# Altium PCB uz_frontpanel_firstfloor.PcbDoc
Units mm, origin at the board's own origin, x right, y up, seen from the top; angles counter-clockwise.
Board outline 129.25 x 56 mm, 4 copper layers (Top Copper, Signal Layer 1, Signal Layer 2, Bottom Copper), stack 1.57 mm thick; 71 components, 51 nets, 205 pads, 56 vias.
Unrouted connection lines stored in the file: 3.
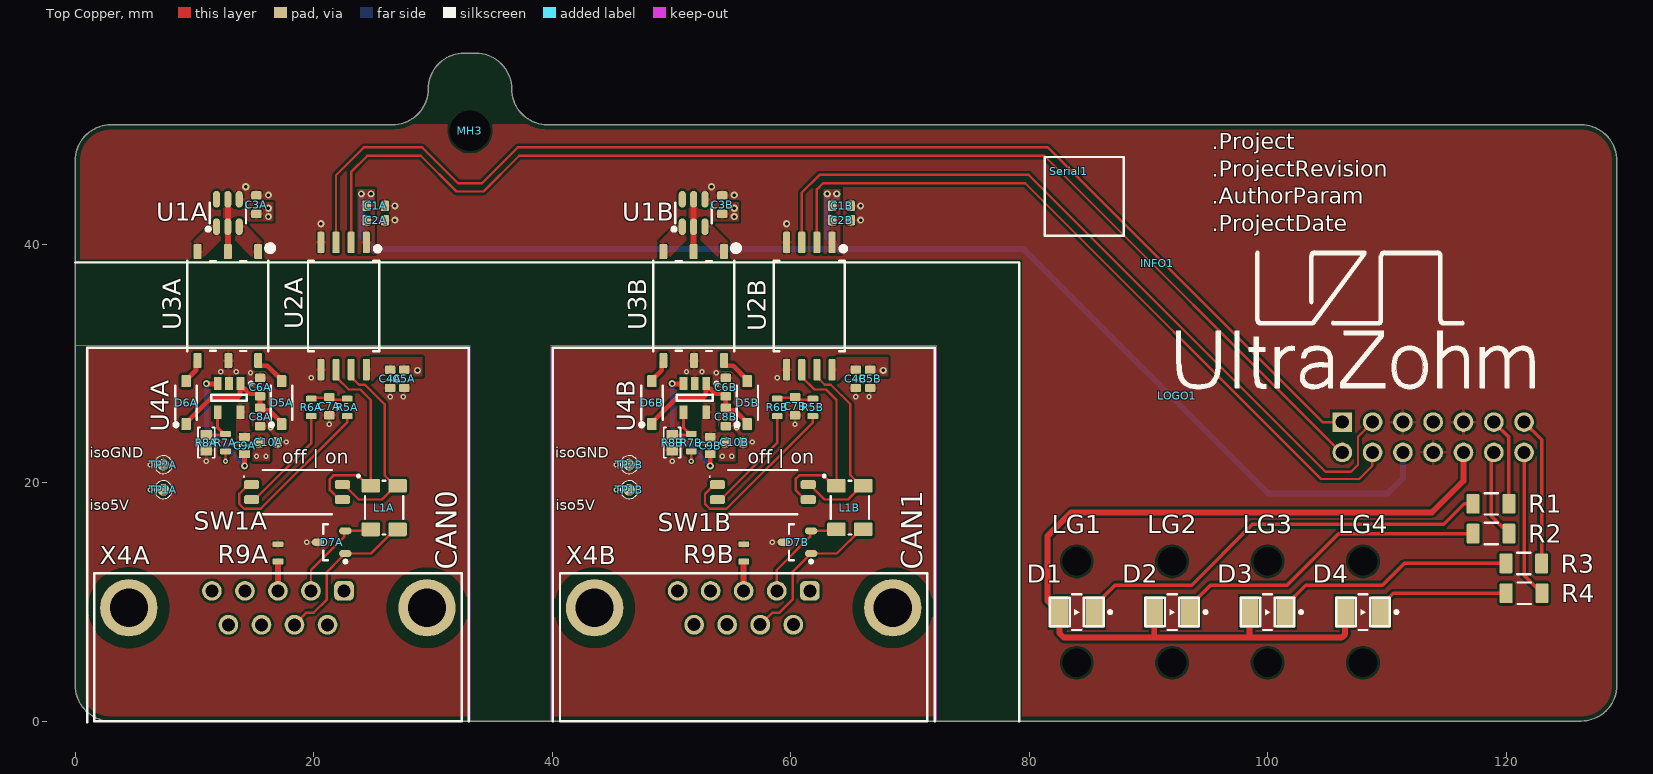
[diagram p0: Top Copper view]
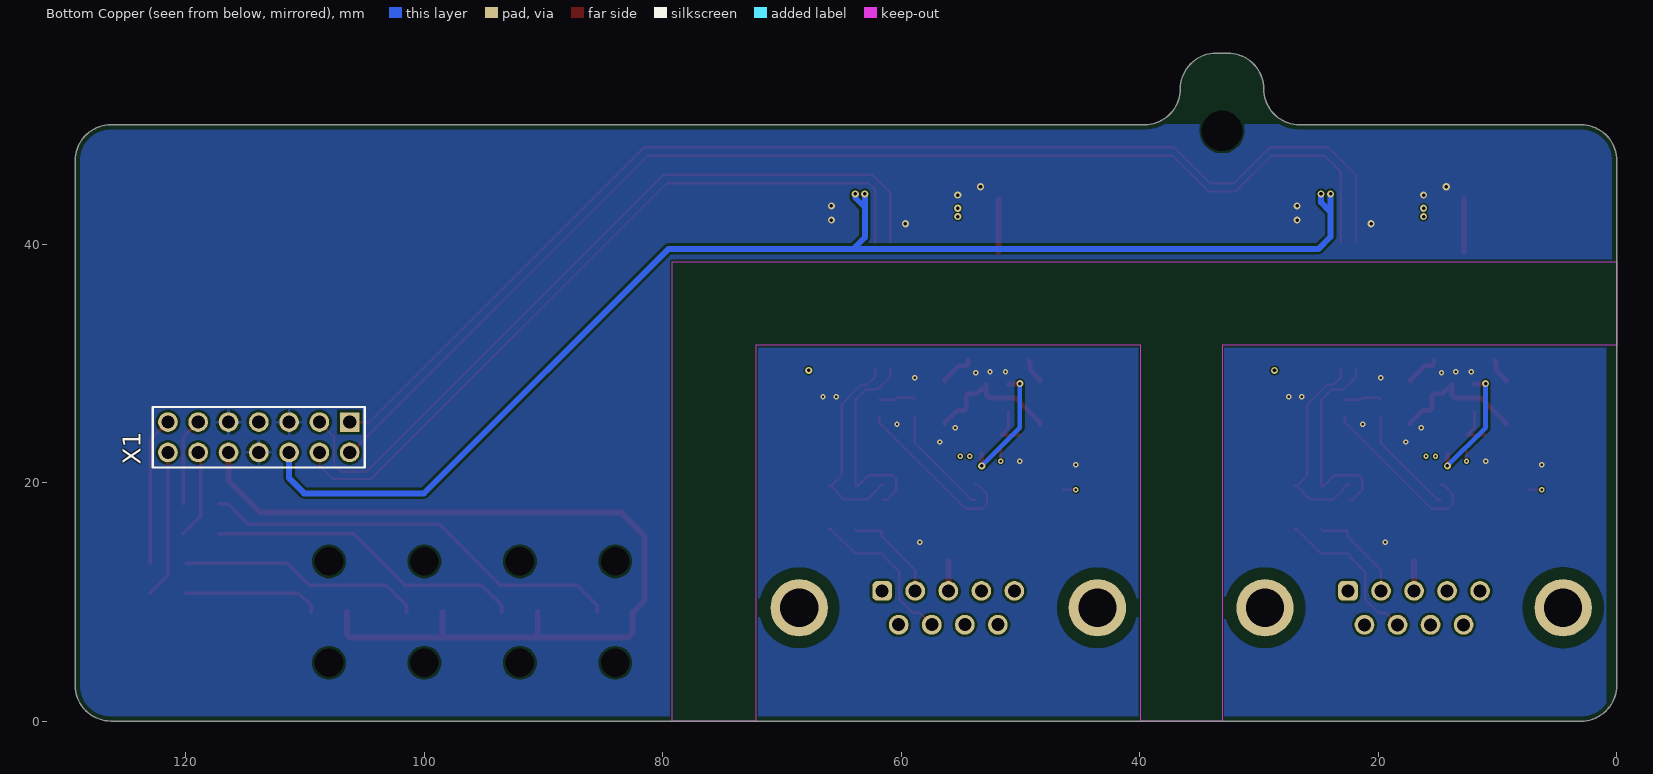
[diagram p1: Bottom Copper view, seen from below]
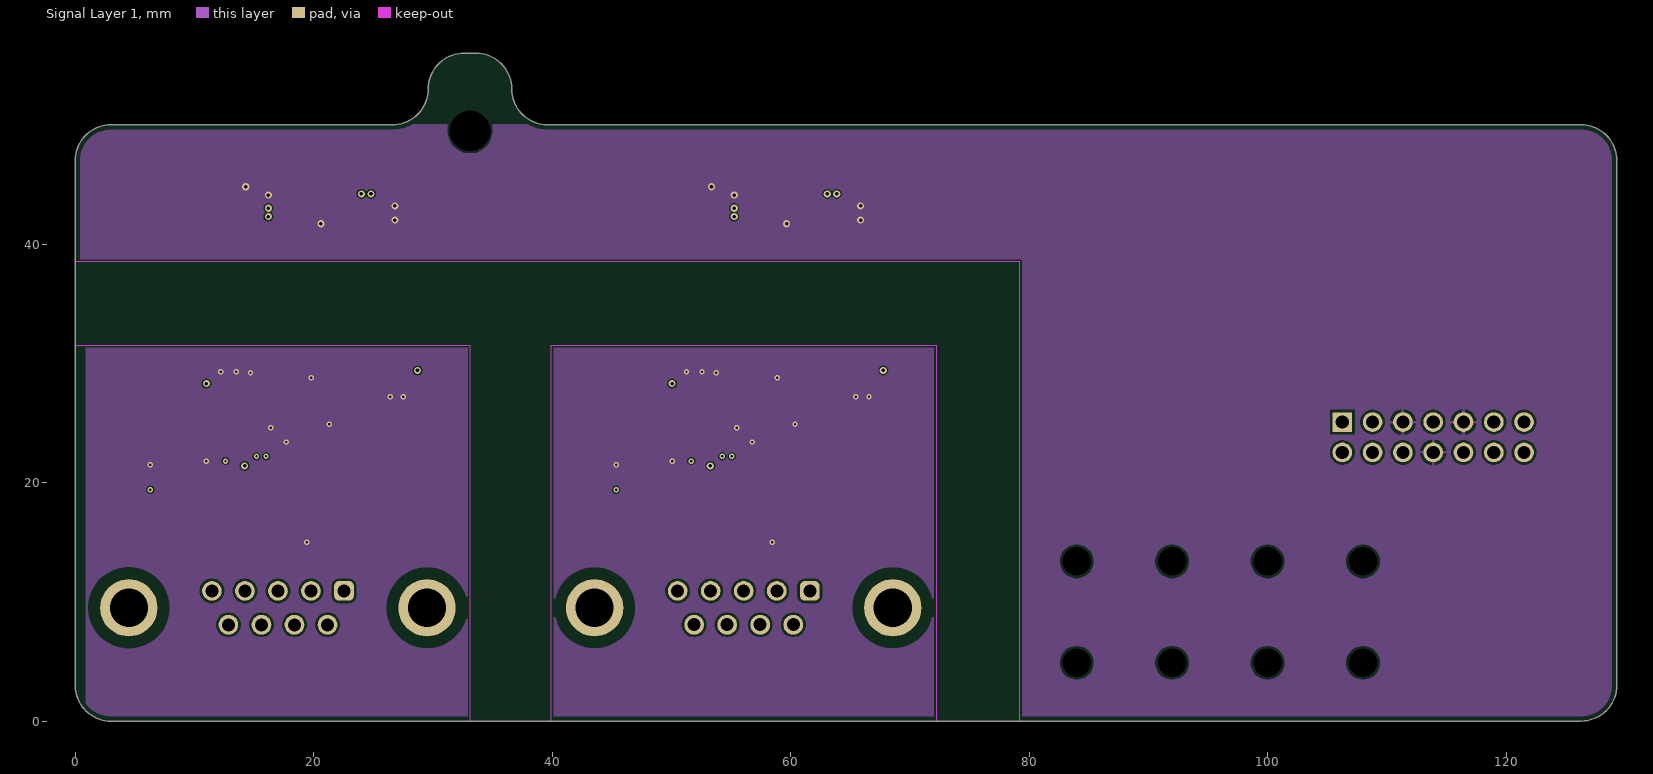
[diagram p2: Signal Layer 1]
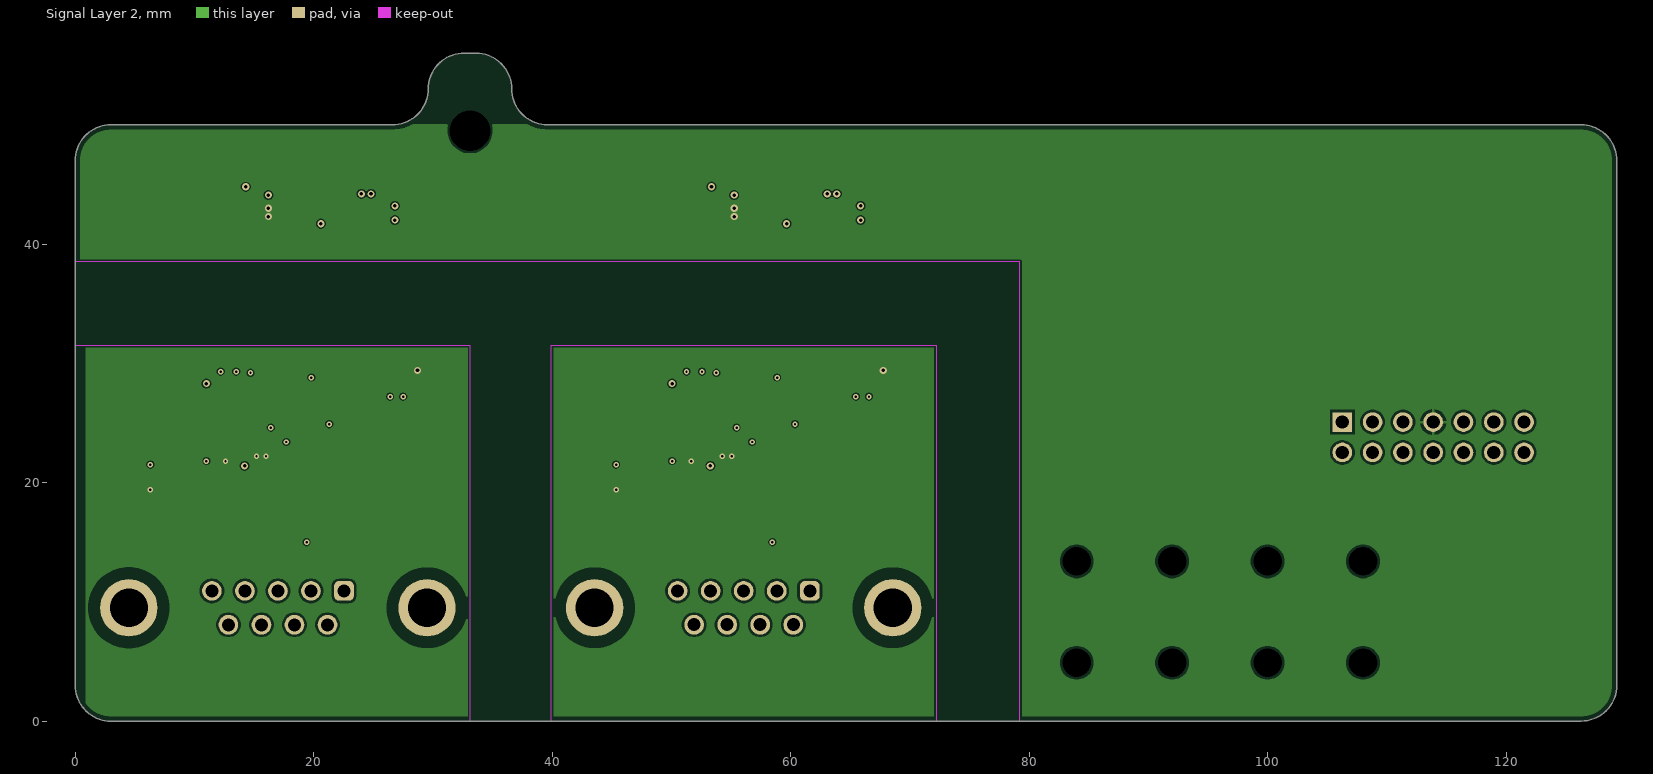
[diagram p3: Signal Layer 2]
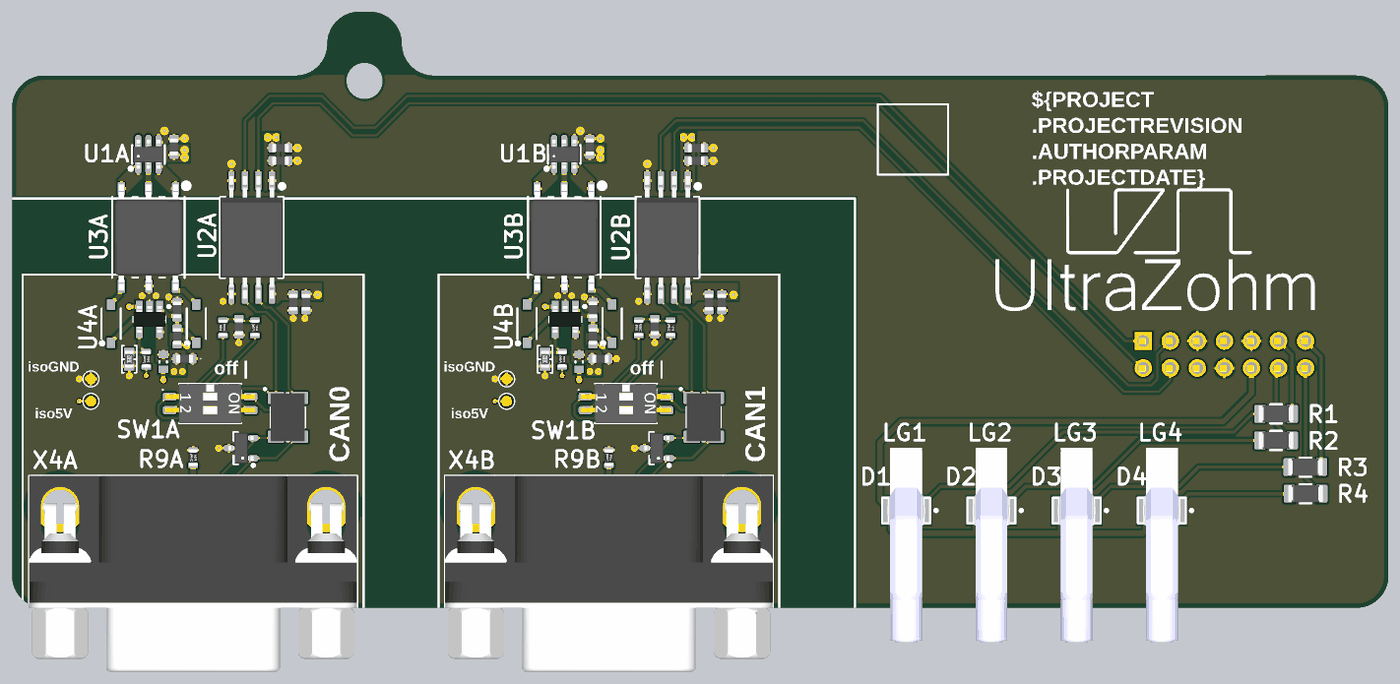
[diagram p4: 3D render of the assembled board from above, using the file's embedded part models]

## Layer stack, top to bottom
Top Mask: solder mask 0.015, Solder Resist, Dk 3.8
Top Copper: signal copper 0.035
Dielectric 1: prepreg 0.2, 7628, Dk 4.6
Signal Layer 1: signal copper 0.0175
Core: core 1.065, FR-4, Dk 4.5
Signal Layer 2: signal copper 0.0175
Dielectric 2: prepreg 0.2, 7628, Dk 4.6
Bottom Copper: signal copper 0.035
Bottom Mask: solder mask 0.015, Solder Resist, Dk 3.8

## Board outline
0,3 0,47 cw(c3,47) 3,50 26.6,50.002 26.6,50 ccw(c26.6,53) 29.6,53 cw(c32.6,53) 32.6,56 33.6,56 cw(c33.6,53) 36.6,53 ccw(c39.6,53) 39.6,50 126.25,50.007 126.25,50 cw(c126.25,47) 129.25,47 129.25,3 cw(c126.25,3) 126.25,0 3,0 cw(c3,3)

## Design rules (kind name [scope] priority, off if disabled: settings)
BoardOutlineClearance BoardOutlineClearance_Silkscreen [OnLayer('Top Overlay')           OR  OnLayer('Bottom Overlay')] p1: gap=0 ignorepadtopadclearanceinfootprint=FALSE
BoardOutlineClearance [All] p2: gap=0.4 ignorepadtopadclearanceinfootprint=FALSE except(0: Arc-SplitContinuation Track-SplitContinuation SMDPad-SplitContinuation THPad-SplitContinuation Via-SplitContinuation Fill-SplitContinuation Poly-SplitContinuation Region-SplitContinuation Text-SplitContinuation)
Clearance Clearance_FGND [InNet('FGND')] p1: gap=0.2 ignorepadtopadclearanceinfootprint=FALSE except(0: Arc-Text Track-Text SMDPad-Text THPad-Text Via-Text Fill-Text Poly-Text Region-Text Text-Text Text-Hole; 0.1: Arc-Arc Arc-Track Track-Track; 0.127: SMDPad-SMDPad; 0.254: Arc-Via Track-Via SMDPad-THPad THPad-THPad Via-Via; 1: Arc-Poly Track-Poly SMDPad-Poly THPad-Poly Via-Poly Fill-Poly Poly-Poly)
Clearance Clearance_HS_PADS [All vs IsThruPin and InNetClass('HS')] p2: gap=0.1 ignorepadtopadclearanceinfootprint=FALSE except(0: Arc-Hole Track-Hole SMDPad-Hole THPad-Hole Via-Hole Fill-Hole Poly-Hole Region-Hole Text-Hole; 0.2: Poly-Poly; 0.3: Via-Poly; 0.5: Track-Poly; 0.516: THPad-Poly)
Clearance Clearance_HS_VIA [InNetClass('HS')] p3: gap=0.1 ignorepadtopadclearanceinfootprint=FALSE except(0: Arc-Hole Track-Hole SMDPad-Hole THPad-Hole Fill-Hole Poly-Hole Region-Hole Text-Hole; 0.2: THPad-Poly Poly-Poly; 0.205: Via-Hole; 0.4: Via-Poly; 0.6: Arc-Poly Track-Poly)
Clearance Clearance_FGND_AETH [InNet('FGND-AETH')] p4: gap=0.2 ignorepadtopadclearanceinfootprint=FALSE except(0: Arc-Text Track-Text SMDPad-Text THPad-Text Via-Text Fill-Text Poly-Text Region-Text Text-Text Text-Hole; 0.1: Arc-Arc Arc-Track Track-Track Via-Poly; 0.127: SMDPad-SMDPad; 0.15: THPad-Region; 0.254: Arc-Via Track-Via SMDPad-THPad THPad-THPad Via-Via)
Clearance Clearance_Power [OnLayer('L02_GND') or OnLayer('L03_VCC')] p5: gap=0.1 ignorepadtopadclearanceinfootprint=FALSE except(0: Arc-Hole Track-Hole SMDPad-Hole THPad-Hole Via-Hole Fill-Hole Poly-Hole Region-Hole Text-Hole; 0.15: Via-Poly; 0.25: THPad-Poly; 0.3: Fill-Poly Poly-Poly; 0.5: Track-Poly)
Clearance Clearance_D100_VIA [InNetClass('D100')] p6: gap=0.1 ignorepadtopadclearanceinfootprint=FALSE except(0: Arc-Hole Track-Hole SMDPad-Hole THPad-Hole Fill-Hole Poly-Hole Region-Hole Text-Hole; 0.2: Track-Poly SMDPad-Poly THPad-Poly Fill-Poly Poly-Poly Poly-Region; 0.204: Via-Hole)
Clearance [All] p7: gap=0.2 ignorepadtopadclearanceinfootprint=FALSE except(0: Arc-Text Track-Text SMDPad-Text THPad-Text Via-Text Fill-Text Poly-Text Region-Text Text-Text Text-Hole; 0.1: Arc-Arc Arc-Track Track-Track Via-Poly; 0.127: SMDPad-SMDPad; 0.254: Arc-Via Track-Via SMDPad-THPad THPad-THPad Via-Via)
ComponentClearance ComponentClearance_SSD [HasFootprint('2199230-3') OR HasFootprint('M.2-NGFF-Socket-2242BM')] p1: gap=-0.1 collisioncheckmode=3 verticalgap=-0.1 showdistances=FALSE
ComponentClearance ComponentClearance_Trenz_TOP [InComponentClass('Top Side Components') and not HasFootprint('TP_1mm') vs InComponentClass('Top Side Components') and not HasFootprint('TP_1mm')] p2: gap=0.3 collisioncheckmode=3 verticalgap=-0.1 showdistances=FALSE
ComponentClearance ComponentClearance_Trenz_BOTTOM [InComponentClass('Bottom Side Components') and not HasFootprint('TP_1mm') vs InComponentClass('Bottom Side Components') and not HasFootprint('TP_1mm')] p3: gap=0.3 collisioncheckmode=3 verticalgap=0 showdistances=FALSE
ComponentClearance ComponentClearance_Trenz [All] p4 off: gap=0.3 collisioncheckmode=3 verticalgap=-0.1 showdistances=FALSE
ComponentClearance [All] p5 off: gap=0.1 collisioncheckmode=3 verticalgap=0.1 showdistances=FALSE
DiffPairsRouting DiffPairsRouting_d100 [InNetClass('D100')] p1: maxlimit=0.12 minlimit=0.12 mostfreqgap=0.12 toplayer_minwidth=0.15 toplayer_maxwidth=0.15 toplayer_prefwidth=0.15 midlayer1_minwidth=0.1 midlayer1_maxwidth=0.1 midlayer1_prefwidth=0.1 midlayer2_minwidth=0.1 midlayer2_maxwidth=0.1 midlayer2_prefwidth=0.1 bottomlayer_minwidth=0.15 bottomlayer_maxwidth=0.15 bottomlayer_prefwidth=0.15 impedanceprofiledriven=TRUE impedanceprofileid={A87F44F6-0E67-4024-941D-6C37FD41847A} maxuncoupledlength=12.7
DiffPairsRouting [All] p2: maxlimit=0.254 minlimit=0.2 mostfreqgap=0.2 toplayer_minwidth=0.09 toplayer_maxwidth=0.254 toplayer_prefwidth=0.2 midlayer1_minwidth=0.09 midlayer1_maxwidth=0.254 midlayer1_prefwidth=0.2 midlayer2_minwidth=0.1 midlayer2_maxwidth=0.254 midlayer2_prefwidth=0.2 bottomlayer_minwidth=0.09 bottomlayer_maxwidth=0.254 bottomlayer_prefwidth=0.2 maxuncoupledlength=70
Height [All] p1: minheight=0 maxheight=50 prefheight=12.7
HoleSize [All] p1: absolutevalues=TRUE maxlimit=6.3 minlimit=0.15 maxpercent=80.000 minpercent=20.000
MatchedLengths [InNetClass('SATA') or InNetClass('HS')] p1: tolerance=0.1 checknetsindiffpair=TRUE checkdiffpairvsdiffpair=FALSE checkxsignals=FALSE checkothers=FALSE
MinimumSolderMaskSliver [All] p1: minsoldermaskwidth=0.1
PolygonConnect "PWR Mosfets" [(InNetClass('PWR') AND HasFootprint('SOIC127P600X175-8N'))] p1: connectstyle=Relief reliefconductorwidth=0.254 reliefentries=4 polygonreliefangle="90 Angle" airgapwidth=0.125
PolygonConnect PWR [InNetClass('PWR')] p2: connectstyle=Direct reliefconductorwidth=0.2 reliefentries=4 polygonreliefangle="90 Angle" airgapwidth=0.25
PolygonConnect PolygonConnect_Therm [HoleSize > 2.6] p3: connectstyle=Direct reliefconductorwidth=0.254 reliefentries=4 polygonreliefangle="90 Angle" airgapwidth=0.254
PolygonConnect PolygonConnect_via [InPadClass('pad') or IsVia] p4: connectstyle=Direct reliefconductorwidth=0.254 reliefentries=4 polygonreliefangle="90 Angle" airgapwidth=0.254
PolygonConnect PolygonConnect_GND [InNet('GND')] p5: thpad.connectstyle=Relief thpad.reliefconductorwidth=0.254 thpad.reliefentries=4 thpad.polygonreliefangle="90 Angle" thpad.airgapwidth=0.254 smdpad.connectstyle=Relief smdpad.reliefconductorwidth=0.254 smdpad.reliefentries=4 smdpad.polygonreliefangle="90 Angle" smdpad.airgapwidth=0.102 via.connectstyle=Direct via.reliefconductorwidth=0.254 via.reliefentries=4 via.polygonreliefangle="90 Angle" via.airgapwidth=0.254
PolygonConnect PolygonConnect_default [All] p6: thpad.connectstyle=Relief thpad.reliefconductorwidth=0.254 thpad.reliefentries=4 thpad.polygonreliefangle="90 Angle" thpad.airgapwidth=0.254 smdpad.connectstyle=Relief smdpad.reliefconductorwidth=0.254 smdpad.reliefentries=4 smdpad.polygonreliefangle="90 Angle" smdpad.airgapwidth=0.102 via.connectstyle=Direct via.reliefconductorwidth=0.254 via.reliefentries=4 via.polygonreliefangle="90 Angle" via.airgapwidth=0.254
ReturnPath ReturnPath_Diff [InNetClass('ADC_OUT_P[1..10]') OR InNetClass('ADC_OUT_N[1..10]') or InNetClass('CLK_Ext_P[1..2]') or InNetClass('CLK_Ext_N[1..2]') or InNetClass('CLK_P[1..10]') OR InNetClass('CLK_N[1..10]') or InNetClass('ExtADC_DataOut_P[1..5]') or InNetClass('ExtADC_DataOut_N[1..5]')] p1 off: impedanceprofileid={A4AA20AD-5FED-4174-92F6-DFDFDA660EC9} _gaplimit=0 _useantipads=TRUE
RoomDefinition isoCAN0 [InComponentClass('isoCAN0')] p1: confinementstyle=ConfineIn formatcopy=TRUE lockcomponents=FALSE outline 32.821,44.853 1.221,44.853 1.221,-6.247 32.821,-6.247
RoomDefinition isoCAN1 [InComponentClass('isoCAN1')] p2: confinementstyle=ConfineIn formatcopy=TRUE lockcomponents=FALSE outline 71.871,44.853 40.271,44.853 40.271,-6.247 71.871,-6.247
RoutingVias [All] p1: holewidth=0.2 width=0.4 viastyle="Through Hole" minholewidth=0.2 minwidth=0.4 maxholewidth=0.5 maxwidth=1
SolderMaskExpansion [All] p1 off: expansion=0.102 istentingtop=FALSE
SolderMaskExpansion SolderMaskExpansion_Trenz [All] p2: expansion=0 istentingtop=FALSE
UnRoutedNet [All] p1: checkbadconnections=TRUE
ViasUnderSMD [All] p1: allowed=FALSE
Width [All] p1: maxlimit=10 minlimit=0.09 preferedwidth=0.15 midlayer1_prefwidth=0.1 midlayer2_prefwidth=0.1 minimp=50.000000 maximp=50.000000 favimp=50.000000
24 further rules are at their usual default settings.

## Classes and differential pairs
channel class isoCAN: isoCAN0 isoCAN1
component class isoCAN1: C1B C2B C3B C4B C5B C6B C7B C8B C9B C10B D5B D6B D7B L1B R5B R6B R7B R8B R9B SW1B TP1B TP2B U1B U2B U3B U4B X4B
component class isoCAN0: C1A C2A C3A C4A C5A C6A C7A C8A C9A C10A D5A D6A D7A L1A R5A R6A R7A R8A R9A SW1A TP1A TP2A U1A U2A U3A U4A X4A

## Components (designator, comment, footprint, x,y, rotation, side; value= is the part's Value field where it differs from the comment)
C1A "10 µF" C_0603_TE 25.2,43.2 r270 top (schematic designator C1)
C1B "10 µF" C_0603_TE 64.25,43.2 r270 top (schematic designator C1)
C2A "100 nF" C_0603_TE 25.2,42 r270 top (schematic designator C2)
C2B "100 nF" C_0603_TE 64.25,42 r270 top (schematic designator C2)
C3A "100 nF" C_0603_TE 15.2,43.3 r0 top (schematic designator C3)
C3B "100 nF" C_0603_TE 54.25,43.3 r0 top (schematic designator C3)
C4A "100 nF" C_0603_TE 26.4,28.7 r180 top (schematic designator C4)
C4B "100 nF" C_0603_TE 65.45,28.7 r180 top (schematic designator C4)
C5A "10 µF" C_0603_TE 27.6,28.7 r180 top (schematic designator C5)
C5B "10 µF" C_0603_TE 66.65,28.7 r180 top (schematic designator C5)
C6A "10 µF" C_0603_TE 15.5,28 r0 top (schematic designator C6)
C6B "10 µF" C_0603_TE 54.55,28 r0 top (schematic designator C6)
C7A "4.7 nF" C_0603_TE 21.3,26.4 r0 top (schematic designator C7)
C7B "4.7 nF" C_0603_TE 60.35,26.4 r0 top (schematic designator C7)
C8A "10 µF" C_0603_TE 15.5,25.5 r180 top (schematic designator C8)
C8B "10 µF" C_0603_TE 54.55,25.5 r180 top (schematic designator C8)
C9A "1 nF" C_0603 14.2,23.1 r90 top (schematic designator C9)
C9B "1 nF" C_0603 53.25,23.1 r90 top (schematic designator C9)
C10A "10 µF" C_0603_TE 16.2,23.4 r270 top (schematic designator C10)
C10B "10 µF" C_0603_TE 55.25,23.4 r270 top (schematic designator C10)
D1 "LG T67K-H2K1-24-Z" FP-LS_T676-Q1R2-1-Z-MFG 83.97,9.14 r180 top
D2 "LG T67K-H2K1-24-Z" FP-LS_T676-Q1R2-1-Z-MFG 91.97,9.14 r180 top
D3 "LS T676-Q1R2-1" FP-LS_T676-Q1R2-1-Z-MFG 99.97,9.14 r180 top
D4 "LG T67K-H2K1-24-Z" FP-LS_T676-Q1R2-1-Z-MFG 107.97,9.14 r180 top
D5A "MBR0520LT1G" SOD3816X120N 17.3,26.7 r90 top value=- (schematic designator D5)
D5B "MBR0520LT1G" SOD3816X120N 56.35,26.7 r90 top value=- (schematic designator D5)
D6A "MBR0520LT1G" SOD3816X120N 9.3,26.7 r90 top value=- (schematic designator D6)
D6B "MBR0520LT1G" SOD3816X120N 48.35,26.7 r90 top value=- (schematic designator D6)
D7A "CDSOT23-T24CAN" SOT95P237X112-3N 21.5,15 r180 top value="TVS, 24 V" (schematic designator D7)
D7B "CDSOT23-T24CAN" SOT95P237X112-3N 60.55,15 r180 top value="TVS, 24 V" (schematic designator D7)
INFO1 "Design Information" Design_info 90.7,38.4 r0 top
L1A "744235900" WE-CNSW-1812 25.9,17.9 r270 top value="50 mOhm" (schematic designator L1)
L1B "744235900" WE-CNSW-1812 64.95,17.9 r270 top value="50 mOhm" (schematic designator L1)
LG1 "1271.1000" 1271.1000 83.97,13.39 r270 top locked
LG2 "1271.1000" 1271.1000 91.97,13.39 r270 top locked
LG3 "1271.1000" 1271.1000 99.97,13.39 r270 top locked
LG4 "1271.1000" 1271.1000 107.97,13.39 r270 top locked
LOGO1 "UZ Logo" UZ_Logo_small 92.4,27.3 r0 top
MH3 "Mounting Hole" MH_3.4 33.1,49.5 r90 top
R1 "1k6" R_1206_TE 118.705,18.22 r90 top
R2 "1k6" R_1206_TE 118.705,15.72 r90 top
R3 "4k7" R_1206_TE 121.45,13.22 r90 top
R4 "1k6" R_1206_TE 121.475,10.72 r90 top
R5A "62R" R_0603_TE 22.8,26.3 r0 top (schematic designator R5)
R5B "62R" R_0603_TE 61.85,26.3 r0 top (schematic designator R5)
R6A "62R" R_0603_TE 19.8,26.3 r180 top (schematic designator R6)
R6B "62R" R_0603_TE 58.85,26.3 r180 top (schematic designator R6)
R7A "22k" R_0603_TE 12.6,23.35 r0 top (schematic designator R7)
R7B "22k" R_0603_TE 51.65,23.35 r0 top (schematic designator R7)
R8A "6k98" "RES 0603_1608" 11,23.35 r90 top (schematic designator R8)
R8B "6k98" "RES 0603_1608" 50.05,23.35 r90 top (schematic designator R8)
R9A "0R" R_0603_TE 17,14.1 r0 top (schematic designator R9)
R9B "0R" R_0603_TE 56.05,14.1 r0 top (schematic designator R9)
Serial1 "Serial #" SERIAL 83.3,46.1 r0 top
SW1A "218-2LPSTR" 2182LPSTR 18.6,19.2 r270 top (schematic designator SW1)
SW1B "218-2LPSTR" 2182LPSTR 57.65,19.2 r270 top (schematic designator SW1)
TP1A "Testpoint 1mm" TP_1mm 7.4,19.4 r90 top (schematic designator TP1)
TP1B "Testpoint 1mm" TP_1mm 46.45,19.4 r90 top (schematic designator TP1)
TP2A "Testpoint 1mm" TP_1mm 7.4,21.5 r90 top (schematic designator TP2)
TP2B "Testpoint 1mm" TP_1mm 46.45,21.5 r90 top (schematic designator TP2)
U1A "SN6505" SOT95P280X145-6N 12.8,42.6 r90 top (schematic designator U1)
U1B "SN6505" SOT95P280X145-6N 51.85,42.6 r90 top (schematic designator U1)
U2A "ISO1042" SOIC127P1150X280-8L50N 22.5,34.8 r270 top (schematic designator U2)
U2B "ISO1042" SOIC127P1150X280-8L50N 61.55,34.8 r270 top (schematic designator U2)
U3A "760390015" 760390015 12.8,34.8 r270 top (schematic designator U3)
U3B "760390015" 760390015 51.85,34.8 r270 top (schematic designator U3)
U4A "LT1761" SOT23-5_N 12.9,27.1 r270 top (schematic designator U4)
U4B "LT1761" SOT23-5_N 51.95,27.1 r270 top (schematic designator U4)
X1 "MTSW-107-11-T-D-740" MTSW-107-11-T-D-740 106.235,25.07 r0 bottom locked
X4A "D-SUB 9, female" 618009231121 17,6.2 r0 top locked (schematic designator X4)
X4B "D-SUB 9, female" 618009231121 56.05,6.2 r0 top locked (schematic designator X4)

## Footprints (in the part's own frame and the unit in brackets; to place one, negate y for a bottom-side part, rotate by r counter-clockwise, add the part's x,y. Pads: shape width x height; smd on the part's side, far side on the other; paste and mask are expansions set on the pad)
1271.1000 [mm]
  round 2.1 hole 2.4 unplated: 1(0,0) 2(8.5,0)
  silkscreen extent 3.05,-2.25 5.45,2.25, body extent -1.65,-1.5 16.64,1.5, height 6.58
2182LPSTR [mm]
  rrect50% 0.76x1.27 smd: 1(-0.635,-3.81) 2(0.635,-3.81) 3(0.635,3.81) 4(-0.635,3.81)
  silkscreen extent -1.86,-4.5 1.86,2.9, body extent -1.86,-4.22 1.86,4.22, height 2.5
760390015 [mm]
  rrect30% 1.27x0.66 smd: 1(-4.57,2.54) 2(-4.57,0) 3(-4.57,-2.54) 4(4.57,-2.54) 5(4.57,0.04) 6(4.57,2.54)
  silkscreen extent -5.1,-3.4 3.8,3.8, body extent -4.98,-3.23 4.98,3.25, height 4.06
618009231121 [mm] "9 pins, right angled, 8.08mm, with hex screw"
  rrect50% 1.65x1.65 hole 1.09: 1(5.54,4.72)
  round 1.65 hole 1.09: 2(2.77,4.72) 3(0,4.72) 4(-2.77,4.72) 5(-5.54,4.72) 6(4.155,1.88) 7(1.385,1.88) 8(-1.385,1.88) 9(-4.155,1.88)
  round 4.8 hole 3.2: M1(-12.5,3.3) M2(12.5,3.3)
  silkscreen extent -15.4,-6.2 15.4,6.2, body extent -15.4,-12.2 15.4,6.2, height 12.55
C_0603 [mm] "Chip Capacitor, Body 1.6x0.8mm, Height 1.0mm, IPC High Density"
  rect 0.7x0.9 smd: 1(-0.7,0) 2(0.7,0)
  silkscreen extent -0.05,-0.35 0.05,0.35, body extent -0.87,-0.47 0.88,0.48, height 1
C_0603_TE [mm] "Vishay VJ0603 1.6 x 0.8 (+0.15/-0.1) 0.4 +/- 0,15mm Kontakte"
  rrect33% 0.88x0.71 smd: 1(0,0.77) 2(0,-0.77)
  body extent -0.4,-0.8 0.4,0.8, height 1
Design_info [mm] "Design information about the PCB"
FP-LS_T676-Q1R2-1-Z-MFG [mm]
  rect 1.5x2.6 smd paste+0 mask+0: 1(-1.5,0) 2(1.5,0)
  silkscreen extent -2.93,-1.5 0.38,1.5, body extent -2.35,-1.6 2.35,1.6, height 0.25
MH_3.4 [mm]
  round 3.1 hole 3.4 unplated: 1(0,0)
MTSW-107-11-T-D-740 [mm]
  rect 1.65x1.65 hole 1.1: 1(0,0)
  round 1.65 hole 1.1: 2(0,2.54) 3(2.54,0) 4(2.54,2.54) 5(5.08,0) 6(5.08,2.54) 7(7.62,0) 8(7.62,2.54) 9(10.16,0) 10(10.16,2.54) 11(12.7,0) 12(12.7,2.54) 13(15.24,0) 14(15.24,2.54)
  silkscreen extent -1.27,-1.27 16.51,3.81, body extent -1.38,-1.24 16.4,3.84, height 21.34
R_0603_TE [mm] "Vishay D0603 1.55 x 0.85 (+0.1/-0.05) 0.3 +/- 0,2mm Kontakte"
  rrect33% 0.9x0.5 smd: 1(0,0.73) 2(0,-0.73)
  body extent -0.42,-0.78 0.43,0.77, height 0.45
R_1206_TE [mm] "Vishay D1206 3.2 x 1.6 (+/- 0.15), 0.2mm - 0.6mm Kontakte"
  rrect20% 1.66x1.1 smd: 1(0,1.5) 2(0,-1.5)
  silkscreen extent -0.9,-0.55 0.9,0.55, body extent -0.8,-1.62 0.8,1.63, height 0.6
"RES 0603_1608" [mm] "Chip Resistor, 2-Leads, Body 1.60x0.80mm, IPC Medium Density"
  rect 0.85x0.95 smd: 1(-0.65,0) 2(0.65,0)
  silkscreen extent -1.27,-0.7 1.27,0.7, body extent -0.8,-0.4 0.8,0.4, height 0.45
SERIAL [mm]
  silkscreen extent -2,-5.4 4.6,1.2
SOD3816X120N [mm]
  rrect20% 1x0.8 smd: 1(-1.8,0) 2(1.8,0)
  silkscreen extent -2,-0.9 1.43,1, body extent -1.42,-0.9 1.43,0.9, height 1.2
SOIC127P1150X280-8L50N [mm] "Small Outline IC (SOIC), 1.27 mm pitch; 8 pin, 5.85 mm L X 7.50 mm W X 2.80 mm H body"
  rrect33% 1.8x0.59 smd: 1(-5.33,1.905) 2(-5.33,0.635) 3(-5.33,-0.635) 4(-5.33,-1.905) 5(5.33,-1.905) 6(5.33,-0.635) 7(5.33,0.635) 8(5.33,1.905)
  silkscreen extent -5,-2.98 3.8,3.05, body extent -5.75,-2.93 5.75,2.93, height 2.8
SOT23-5_N [mm] "SOT23, 5-Leads, Body 2.9x1.6mm, Pitch 0.95mm, Lead Span 2.8mm, IPC Medium Density"
  rect 1.1x0.65 smd: 1(-1.2,0.95) 2(-1.2,0) 3(-1.2,-0.95) 4(1.2,-0.95) 5(1.2,0.95)
  silkscreen extent -1.32,-1.5 0.25,1.95, body extent -1.25,-1.5 1.25,1.5, height 1.06
SOT95P237X112-3N [mm]
  oval 1.05x0.6 smd: 1(-1.15,0.95) 2(-1.15,-0.95) 3(1.15,0)
  silkscreen extent -1.28,-1.5 0.7,1.75, body extent -1.18,-1.46 1.19,1.46, height 1.12
SOT95P280X145-6N [mm]
  oval 1.4x0.6 smd: 1(-1.15,0.95) 2(-1.15,0) 3(-1.15,-0.95) 4(1.15,-0.95) 5(1.15,0) 6(1.15,0.95)
  silkscreen extent -1.5,-1.53 0.87,1.8, body extent -1.35,-1.45 1.35,1.45, height 1.45
TP_1mm [mm]
  round 1 smd paste-1: 1(0,0)
  silkscreen extent -0.75,-0.75 0.75,0.75
UZ_Logo_small [mm] "logo width 3cm"
  silkscreen extent -0.05,0.57 29.94,12.12
WE-CNSW-1812 [mm]
  rrect20% 1.15x1.55 smd: 1(-1.825,-1.125) 2(1.825,-1.125) 3(1.825,1.125) 4(-1.825,1.125)
  silkscreen extent -2.75,-2.25 2.25,1.6, body extent -2.25,-1.6 2.25,1.6, height 2.81

## Part data
C1A C1B C5A C5B C6A C6B C8A C8B C10A C10B: library part UZgen_C_0603_10uF_16V_X7R, "Generic capacitor", Device Package=0603, Manufacturer=UZgen, Tolerance="10 %", Voltage=16V, Created from=UZgenTool, Created On="02/08/2024 11:17:59", Last Updated="02/08/2024 11:17:59", Manufacturer Part Number=UZgen_C_0603_10uF_16V_X7R, Mounting Type=SMD, PartID=3807, Technology=X7R
C2A C2B C3A C3B C4A C4B: library part UZgen_C_0603_100nF_50V_X7R, "Generic capacitor", Device Package=0603, Manufacturer=UZgen, Tolerance="10 %", Voltage=50V, Created from=AGeiger, Created On="02/07/2024 14:42:23", Last Updated="08/08/2024 15:01:15", Manufacturer Part Number=UZgen_C_0603_100nF_50V_X7R, Mounting Type=SMD, PartID=1, Technology=X7R
C7A C7B: library part UZgen_C_0603_4.7nF_50V_X7R, "Generic capacitor", Device Package=0603, Manufacturer=UZgen, Tolerance="10 %", Voltage=50V, Created from=UZgenTool, Created On="02/08/2024 11:18:09", Last Updated="02/08/2024 11:18:09", Manufacturer Part Number=UZgen_C_0603_4.7nF_50V_X7R, Mounting Type=SMD, PartID=4255, Technology=X7R
C9A C9B: library part CC0603JRNPO9BN102, "Capacitor 0603, 50 VDC, 1 nF, NP0", Device Package=0603, LCSC Part Number=C106246, Manufacturer=YAGEO, Operating Temperature="-55 - 125°C", Tolerance="5 %", Voltage Rating="50 VDC", Component Type="Capacitor 0603", ComponentLink1Description=Datasheet, ComponentLink1URL=https://datasheet.lcsc.com/lcsc/1811021411_YAGEO-CC0603JRNPO9BN102_C106246.pdf, Created from=AGeiger, Created On="30.08.2022 11:46:28", Last Updated="30.08.2022 11:46:28", Live Cycle Status=1, Manufacturer Part Number=CC0603JRNPO9BN102, Mounting Type=SMD, PartID=104, Series=NP0, Supplier 1=LCSC, Supplier Part Number 1=C106246, Type=Capacitor
D1 D2 D4: "Standard LEDs - SMD Green, 570nm 9mcd, 2mA", Color=green, Device Package=PLCC-2, Forward Current I_f="20 mA", Forward Voltage U_f=2.2V, LCSC Part Number=C5248446, Manufacturer="OSRAM Opto Semicon", Nominal Power=44mW, Operating Temperature="-40 - 100 °C", Component Type="LED Diode", ComponentLink1Description=Datasheet, ComponentLink1URL=https://dammedia.osram.info/media/resource/hires/osram-dam-5522864/LG%20T67K_EN.pdf, Created from=FRosner, Created On="17/07/2024 13:28:00", Last Updated="17/07/2024 14:01:05", Light Intensity="6.28 mcd", Live Cycle Status=1, Manufacturer Part Number="LG T67K-H2K1-24-Z", Mounting Type=SMD, PartID=17, Stock number="not stored", Supplier 1=LCSC, Supplier Part Number 1=C5248446, Type=Standard, Wavelength="570 nm"
D3: "Standard LEDs - SMD Super Red, 645nm 180mcd, 20mA", Color=red, Device Package=PLCC-2, Forward Current I_f="20 mA", Forward Voltage U_f=2.3V, LCSC Part Number=C19360690, Manufacturer="OSRAM Opto Semicon", Nominal Power=46mW, Operating Temperature="-40 - 100 °C", Component Type="LED Diode", ComponentLink1Description=Datasheet, ComponentLink1URL=https://wmsc.lcsc.com/wmsc/upload/file/pdf/v2/lcsc/2312251447_OSRAM-Opto-Semicon-LS-T676-Q1R2-1_C19360690.pdf, Created from=FRosner, Created On="17/07/2024 13:16:06", Last Updated="17/07/2024 13:21:16", Light Intensity="71 ... 180 mcd", Live Cycle Status=1, Manufacturer Part Number="LS T676-Q1R2-1", Mounting Type=SMD, PartID=16, Stock number="not stored", Supplier 1=LCSC, Supplier Part Number 1=C19360690, Type=Standard, Wavelength="633 nm"
D5A D5B D6A D6B: "Schottky Diodes & Rectifiers 0.5A 20V", Case=SOD123-FC, Device Package=SMD, Forward Current="0.5 A", Forward Voltage=20V, LCSC Part Number=C23848, Manufacturer=onsemi, Operating Temperature="-65 to +125 °C", Reverse Current="250 uA", Supplier Part Number 1=863-MBR0520LT1G, Voltage=0.5A, AN=26768, Component Type="Power Schottky Rectifier", ComponentLink1Description=Datasheet, ComponentLink1URL=https://www.mouser.de/datasheet/2/308/1/MBR0520LT1_D-2315148.pdf, Created from=FRosner, Created On="10.06.2024 16:38:30", Extra=AEC−Q101, H-ART=MBR0520LT1G, helpURL=B:\AD\adlib\datasheet\MBR0520, Last Updated="22.08.2024 08:31:16", Live Cycle Status=1, Manufacturer Part Number=MBR0520LT1G, Mixed=SMT, Mounting Type=SMD, PartID=15, Series=MBR0520L, Stock number="not stored", Supplier 1=Mouser, Supplier 2=LCSC, Supplier Part Number 2=C23848, Type="Power Schottky Rectifier"
D7A D7B: "ESD Protection Diodes / TVS Diodes SOT-23 24V CANbus", Device Package=SOT-23-3, LCSC Part Number=C2959841, Manufacturer=Bourns, Operating Temperature="-55 to +150 °C", Power Dissipation="500 W", Supplier Part Number 1=652-CDSOT23-T24CAN, Component Type="TVS Diode, ESD", ComponentLink1Description=Datasheet, ComponentLink1URL=https://www.mouser.de/datasheet/2/54/cdsot23_t24can_q-1534349.pdf, Created from=AGeiger, Created On="22.08.2024 08:08:03", Last Updated="22.08.2024 08:08:03", Live Cycle Status=1, Manufacturer Part Number=CDSOT23-T24CAN, Mounting Type=SMD, PartID=18, Supplier 1=Mouser, Supplier 2=LCSC, Supplier Part Number 2=C2959841, Type=TVS-Diode
INFO1: Manufacturer=UltraZohm, Supplier Part Number 1=-, Component Type="Design Information", ComponentLink1Description=https://docs.ultrazohm.com/, ComponentLink1URL=homepage, Created from=MGremer, Created On="03.11.2021 09:04:23", Last Updated="03.11.2021 09:28:34", Live Cycle Status=1, Manufacturer Part Number="Design Information", PartID=12, Supplier 1=-, Type="Design Information"
L1A L1B: "Common Mode Chokes / Filters WE-CNSW 1812 2000mA 0.3uH 100kHz AECQ200", DC current="2 A", Device Package=1812, Manufacturer="Wuerth Elektronik", Operating Temperature="-40 to +125 °C", Supplier Part Number 1=710-744235900, Component Type=Inductance, ComponentLink1Description=Datasheet, ComponentLink1URL=https://www.mouser.de/datasheet/2/445/744235900-1721392.pdf, Created from=MGremer, Created On="18.01.2021 14:53:17", Last Updated="22.08.2024 11:15:33", Live Cycle Status=1, Manufacturer Part Number=744235900, Mounting Type=SMD, PartID=2, Series=WE-CNSW, Stock number="not stored", Supplier 1=Mouser, Type="Inductance SMD"
LG1 LG2 LG3 LG4: "Light guide, horizontal, 18.29 mm, 1 rod, round, PCB mounting, transparent", Device Package=SMD, LCSC Part Number=C22441102, Manufacturer=MENTOR, Operating Temperature="-40°C - +85°C", Supplier Part Number 1=2300553, Component Type="Light Guide", ComponentLink1Description=Datasheet, ComponentLink1URL=https://www.farnell.com/datasheets/1693501.pdf, Created from=FRosner, Created On="15.07.2024 08:35:38", Last Updated="15.07.2024 08:35:38", Live Cycle Status=1, Manufacturer Part Number=1271.1000, Mounting Type=SMD, PartID=39, Stock number="not stored", Supplier 1=Farnell, Supplier 2=LCSC, Supplier Part Number 2=C22441102, Type=Lightguide
LOGO1: library part 1, "Official Project Logo of the UltraZohm", Manufacturer="PCB Manufacturer", Manufacturer Part Number="UltraZohm Logo", Component Type=Logo, ComponentLink1Description=Homepage, ComponentLink1URL=https://ultrazohm.com, Created from="T. Wendt", Created On="19.02.2021 16:55:56", Last Updated="02.03.2021 14:31:24", Live Cycle Status=1, PartID=1, Type="Standard (No BOM)"
MH3: Device Package=-, Component Type="Mounting Hole", ComponentLink1Description=Datasheet, Created from=MHlatky, Created On="26/01/2021 09:19:51", Last Updated="21/03/2022 23:05:12", Live Cycle Status=1, Manufacturer="Mounting Hole", Manufacturer Part Number="Mounting Hole", PartID=16, Stock number="not stored", Supplier 1="Mounting Hole", Supplier Part Number 1="Mounting Hole", Type="Mounting Hole"
R1 R2 R4: library part UZgen_R_1206_1k6, "Generic resistor", Device Package=1206, Manufacturer=UZgen, Tolerance="1 %", Created from=UZgenTool, Created On="02/07/2024 17:29:56", Last Updated="02/07/2024 17:29:56", Manufacturer Part Number=UZgen_R_1206_1k6, Mounting Type=SMD, PartID=513
R3: library part UZgen_R_1206_4k7, "Generic resistor", Device Package=1206, Manufacturer=UZgen, Tolerance="1 %", Created from=UZgenTool, Created On="02/07/2024 17:29:56", Last Updated="02/07/2024 17:29:56", Manufacturer Part Number=UZgen_R_1206_4k7, Mounting Type=SMD, PartID=524
R5A R5B R6A R6B: library part UZgen_R_0603_62R, "Generic resistor", Device Package=0603, Manufacturer=UZgen, Tolerance="1 %", Created from=UZgenTool, Created On="02/07/2024 17:29:48", Last Updated="02/07/2024 17:29:48", Manufacturer Part Number=UZgen_R_0603_62R, Mounting Type=SMD, PartID=192
R7A R7B: library part UZgen_R_0603_22k, "Generic resistor", Device Package=0603, Manufacturer=UZgen, Tolerance="1 %", Created from=UZgenTool, Created On="02/07/2024 17:29:50", Last Updated="02/07/2024 17:29:50", Manufacturer Part Number=UZgen_R_0603_22k, Mounting Type=SMD, PartID=252
R8A R8B: library part RC0603FR-076K98L, "SMD resistor 1%", Device Package=0603, LCSC Part Number=C137686, Manufacturer=YAGEO, Tolerance=1%, Component Type="SMD resistor", ComponentLink1Description=Datasheet, ComponentLink1URL=https://datasheet.lcsc.com/lcsc/2304140030_YAGEO-RC0603FR-076K98L_C137686.pdf, Created from=AGeiger, Created On="01.06.2023 17:28:06", Last Updated="01.06.2023 17:28:06", Live Cycle Status=1, Manufacturer Part Number=RC0603FR-076K98L, Mounting Type=SMD, PartID=268, Supplier 1=LCSC, Supplier Part Number 1=C137686, Type=Resistor
R9A R9B: library part UZgen_R_0603_0R, "Generic resistor", Device Package=0603, Manufacturer=UZgen, Tolerance="1 %", Created from=UZgenTool, Created On="08.07.2024 14:34:30", Last Updated="08.07.2024 14:34:30", Manufacturer Part Number=UZgen_R_0603_0R, Mounting Type=SMD, PartID=581
Serial1: library part 6, "Field to put in a serial number", Manufacturer="PCB Manufacturer", Manufacturer Part Number="Serial Number", Component Type="Serial Number", Created from="T. Wendt", Created On="02.03.2021 14:31:24", Last Updated="02.03.2021 14:31:24", Live Cycle Status=1, PartID=6, Type="Standard (No BOM)"
SW1A SW1B: "DIP Switches/SIP Switches SPST 2 switch sections", Device Package=SMD-4P,3.7x5.8mm, LCSC Part Number=C2961921, Manufacturer="CTS Electronic Components", Operating Temperature="-55 to +85 °C", Supplier Part Number 1=774-2182LPSTR, Component Type="DIP Switch", ComponentLink1Description=Datasheet, ComponentLink1URL=https://www.mouser.de/datasheet/2/96/CTS_Switches_DIP_218_Series_Datasheet-1144897.pdf, Created from=AGeiger, Created On="23.08.2024 11:42:29", Last Updated="23.08.2024 11:42:29", Live Cycle Status=1, Manufacturer Part Number=218-2LPSTR, Mounting Type=SMD, PartID=44, Supplier 1=Mouser, Supplier 2=LCSC, Supplier Part Number 2=C2961921, Type="Dip Switch 2p"
TP1A TP1B TP2A TP2B: library part NULL, Component Type=Testpoint, Created=2018_06_25_AGeiger, Created from=AGeiger, Created On="20.09.2022 13:14:57", Last Updated="20.09.2022 13:15:39", Live Cycle Status=1, Manufacturer=NULL, Manufacturer Part Number=NULL, PartID=9, Supplier 1=NULL, Supplier Part Number 1=NULL, Type=Testpoint
U1A U1B: library part SN6505BDBVR, "Low-Noise 1-A Transformer Drivers for Isolated Power Supplies", Device Package=SOT-23-6, LCSC Part Number=C74518, Manufacturer="Texas Instruments", Operating Temperature="–55°C to 125°C", Component Type="PMIC Auto Transformer Dvr", ComponentLink1Description=Datasheet, ComponentLink1URL=https://www.ti.com/lit/ds/symlink/sn6505b.pdf, Created from=MGremer/AGeiger/MGeier, Created On="25/08/2024 13:51:34", Last Updated="25/08/2024 13:51:34", Live Cycle Status=1, Manufacturer Part Number=SN6505BDBVR, Mounting Type=SMD, PartID=40, Series=SN650x, Stock number="not stored", Supplier 1=LCSC, Supplier Part Number 1=C74518, Type="Power Management Specialised - PMIC"
U2A U2B: library part ISO1042BDWVR, "CAN Interface IC Isolated CAN transceiver with 70-V bus fault protection & flexible data rate 8-SOIC -40 to 125", Device Package=SOIC-8, LCSC Part Number=C484409, Manufacturer="Texas Instruments", Operating Temperature="-40 to +125 °C", Supplier Part Number 1=595-ISO1042BDWVR, Component Type="Isolated CAN Transceiver", ComponentLink1Description=Datasheet, ComponentLink1URL=https://www.ti.com/lit/ds/symlink/iso1042.pdf?ts=1724307386270&ref_url=https%253A%252F%252Fwww.mouser.de%252F, Created from=AGeiger, Created On="22/08/2024 07:19:44", Last Updated="23/08/2024 14:39:31", Live Cycle Status=1, Manufacturer Part Number=ISO1042BDWVR, Mounting Type=SMD, PartID=9, Stock number="not stored", Supplier 1=Mouser, Type="CAN Transceiver"
U3A U3B: "MID-PPTI Push-Pull Transformers for Texas Instruments; belongs to SN74AVC4T774RSVR", Device Package=Divers, LCSC Part Number=C249186, Manufacturer="Wuerth Elektronik", Supplier Part Number 1=710-760390015, Component Type="Push-Pull Transformer", ComponentLink1Description=Datasheet, ComponentLink1URL=https://www.mouser.de/datasheet/2/445/760390015-221218.pdf, Created from=MGremer, Created On="30.11.2020 14:07:02", Last Updated="22.08.2024 11:23:37", Live Cycle Status=1, Manufacturer Part Number=760390015, Mounting Type=SMD, PartID=6, Stock number="not stored", Supplier 1=Mouser, Supplier 2=Digi-Key, Supplier Part Number 2=732-4459-1-ND, Type="Push-Pull Transformer"
U4A U4B: library part LT1761ES5-BYP#TRPBF, "100mA, Low Noise, LDO Micropower Regulators", Device Package=SOT-23-5, LCSC Part Number=C655161, Manufacturer="Linear Technology", Component Type="LDO Micropower", ComponentLink1Description=Datasheet, ComponentLink1URL=https://www.analog.com/media/en/technical-documentation/data-sheets/1761sff.pdf, Created from=MGremer, Created On="30.11.2020 13:55:34", Last Updated="22.08.2024 08:36:30", Live Cycle Status=1, Manufacturer Part Number=LT1761ES5-BYP#TRPBF, Mounting Type=SMD, PartID=10, Stock number="not stored", Supplier 1=LCSC, Supplier Part Number 1=C655161, Type="LDO Micropower Regulator"
X1: "Headers & Wire Housings Classic PCB Header Strips, 0.100\" pitch", LCSC Part Number=C3332627, Manufacturer=SAMTEC, Operating Temperature="-55 °C to +125 °C", ComponentLink1Description=Datasheet, ComponentLink1URL=https://wmsc.lcsc.com/wmsc/upload/file/pdf/v2/lcsc/2404031808_Samtec-MTSW-107-11-T-D-740_C3332627.pdf, Created from=FRosner, Created On="03/07/2024 10:17:57", Last Updated="10/10/2024 14:28:05", Manufacturer Part Number=MTSW-107-11-T-D-740, Mounting Type=THT, PartID=50, Series=TSW, Supplier 1=LCSC, Supplier Part Number 1=C3332627
X4A X4B: library part 618009231121, "D-Sub Standard Connectors WR-DSUB Female PCB 9Pin Hex Scrw 8.08mm", Contact Resistance=30mOhm, LCSC Part Number=C141882, Manufacturer="Wuerth Elektronik", Operating Temperature="-40 °C to +85 °C", Operating Temperature Max=105°C, Operating Temperature Min=-55°C, Rated Current=3A, Supplier Part Number 1=710-618009231121, Withstanding Voltage=1000VAC, Working Voltage=125VAC, Category="Input/Output Connectors", ComponentLink1Description=Datasheet, ComponentLink1URL=https://www.we-online.com/components/products/datasheet/618009231121.pdf, ComponentLink2Description="Datasheet Link", ComponentLink2URL=https://www.we-online.com/redexpert/spec/618009231121?ad, Created from=AGeiger, Created On="31.05.2023 13:23:16", Gender=Female, Last Updated="31.05.2023 13:23:16", Manufacturer Part Number=618009231121, Match Code=WR-DSUB, Mount="Through Hole", Mounting Type=THT, Number of Pins=9, Orientation=Angled, Packaging=Tray, PartID=6, Series="D-SUB Standard", Supplier 1=Mouser

## Via types
v1: diameter 0.45, hole 0.2, Top Copper to Bottom Copper, 31 vias
v2: diameter 0.6, hole 0.3, Top Copper to Bottom Copper, 24 vias
v3: diameter 0.45, hole 0.2, Top Copper to Bottom Copper, tented both sides, 1 vias

## Nets (pads, with @x,y where several pads share a name; then routed paths per layer and width w, separated by ;. In a path a pad name is that pad's centre, name@x,y a point inside that pad or via, vN(x,y) a via of type N, cw(c..) or ccw(c..) an arc to the next point about the centre after c; other vN are vias at no path point)
1V8: C1A.2 C1B.2 C2A.2 C2B.2 U2A.1 U2B.1 X1.6 | length 110.7
  Bottom Copper w0.5: v2(24,44.2) 24,42.8 ; v2(24.8,44.2) 24.8,43.5 24.1,42.8 24,42.8 ; v2(63.05,44.2) 63.05,43.1 ; v2(63.85,44.2) 63.831,44.181 63.831,43.861 63.07,43.1 63.05,43.1 ; X1.6 111.315,20.365 110.05,19.1 100,19.1 79.5,39.6 64,39.6 ; 24,42.8 24,40.6 25,39.6 64,39.6 ; 63.05,43.1 63.05,40.55 64,39.6
3V3: C3A.2 C3B.2 U1A.2 U1A.5 U1B.2 U1B.5 U3A.2 U3B.2 X1.7 | length 8.8
  Top Copper w0.5: U3A.2 U1A.2 U1A.5 ; U3B.2 U1B.2 U1B.5
  other v2: 16.2,42.3 55.25,42.3 16.2,43 55.25,43
5V_isoCANA: C4A.2 C5A.2 C9A.2 C10A.2 R7A.2 TP1A.1 U2A.8 U4A.5 | length 2
  Top Copper w0.2: v1(6.3,19.4) TP1A.1 ; v1(12.6,21.8) R7A.2@12.6,22.7
  other v1: 15.2,22.2 16,22.2
  other v2: 28.7,29.4
5V_isoCANB: C4B.2 C5B.2 C9B.2 C10B.2 R7B.2 TP1B.1 U2B.8 U4B.5 | length 2
  Top Copper w0.2: v1(45.35,19.4) TP1B.1 ; v1(51.65,21.8) R7B.2@51.65,22.7
  other v1: 54.25,22.2 55.05,22.2
  other v2: 67.75,29.4
CAN0_RXD: U2A.3 X1.1 | length 103
  Top Copper w0.2: U2A.3 21.865,45.765 24.2,48.1 29.1,48.1 32.1,45.1 34.1,45.1 37.1,48.1 81.55,48.1 104.58,25.07 X1.1
CAN0_TXD: U2A.2 X1.2 | length 102.4
  Top Copper w0.2: U2A.2 23.135,46.035 24.5,47.4 28.976,47.4 31.976,44.4 34.224,44.4 37.224,47.4 81.25,47.4 106.12,22.53 X1.2
CAN1_RXD: U2B.3 X1.3 | length 66.1
  Top Copper w0.2: U2B.3 60.915,44.315 62.4,45.8 79.95,45.8 104.85,20.9 106.95,20.9 107.55,21.5 107.55,23.845 X1.3
CAN1_TXD: U2B.2 X1.4 | length 63.1
  Top Copper w0.2: U2B.2 62.185,44.585 62.7,45.1 79.65,45.1 104.45,20.3 107.65,20.3 108.755,21.405 108.755,22.51 X1.4
CAN_HA: D7A.1 L1A.3 X4A.7 | length 13.4
  Top Copper w0.2: X4A.7 19.405,9.1 20,9.1 21.1,10.2 21.1,12.5 22.348,13.748 22.348,13.865 22.533,14.05 D7A.1 24.8,14.05 26.825,16.075 L1A.3
CAN_HB: D7B.1 L1B.3 X4B.7 | length 13.4
  Top Copper w0.2: X4B.7 58.455,9.1 59.05,9.1 60.15,10.2 60.15,12.5 61.399,13.749 61.399,13.865 61.583,14.05 D7B.1 63.85,14.05 65.875,16.075 L1B.3
CAN_LA: D7A.2 L1A.2 X4A.2 | length 8.4
  Top Copper w0.2: X4A.2 19.77,12.67 22.567,15.467 22.567,15.867 D7A.2 24.65,15.95 L1A.2
CAN_LB: D7B.2 L1B.2 X4B.2 | length 8.4
  Top Copper w0.2: X4B.2 58.82,12.67 61.617,15.467 61.617,15.867 D7B.2 63.7,15.95 L1B.2
FGND: X4A.M1 X4A.M2 X4B.M1 X4B.M2
FP_LED1: R1.2 X1.11 | length 7.4
  Top Copper w0.3: X1.11 120.205,23.8 R1.2
FP_LED2: R2.2 X1.12 | length 7.5
  Top Copper w0.3: X1.12 118.705,22.3 118.705,17.22 R2.2
FP_LED3: R3.2 X1.13 | length 12.5
  Top Copper w0.3: X1.13 122.95,23.595 R3.2
FP_LED4: R4.2 X1.14 | length 12.4
  Top Copper w0.3: X1.14 121.475,12.22 R4.2
GND: C1A.1 C1B.1 C2A.1 C2B.1 C3A.1 C3B.1 U1A.4 U1B.4 U2A.4 U2B.4 X1.5 X1.8 X1.9
  other v2: 20.6,41.7 59.65,41.7 26.8,42 65.85,42 26.8,43.2 65.85,43.2 16.2,44.1 55.25,44.1 14.3,44.8 53.35,44.8
GND_isoCANA: C4A.1 C5A.1 C6A.1 C7A.2 C8A.1 C10A.1 D7A.3 R8A.1 R9A.1 TP2A.1 U2A.5 U3A.5 U4A.2
  other v1: 19.4,15 6.3,21.5 11,21.8 16.4,24.6 21.3,24.9 26.4,27.2 27.5,27.2 19.8,28.8 14.7,29.2 12.2,29.3 13.5,29.3
  other v3: 17.7,23.4
GND_isoCANB: C4B.1 C5B.1 C6B.1 C7B.2 C8B.1 C10B.1 D7B.3 R8B.1 R9B.1 TP2B.1 U2B.5 U3B.5 U4B.2
  other v1: 58.45,15 45.35,21.5 50.05,21.8 56.75,23.4 55.45,24.6 60.35,24.9 65.45,27.2 66.55,27.2 58.85,28.8 53.75,29.2 51.25,29.3 52.55,29.3
NetC6A_2: C6A.2 C8A.2 D5A.1 D6A.1 U4A.1 | length 12.2
  Top Copper w0.4: D6A.1 9.3,25 11.4,27.1 13.6,27.1 13.814,27.314 13.814,28.209 13.85,28.245 13.85,27.931 13.938,27.844 14.251,27.844 14.645,27.45 15.35,27.45 15.5,27.3 15.5,26.2 15.65,26.05 16.25,26.05 17.3,25 D5A.1
NetC6B_2: C6B.2 C8B.2 D5B.1 D6B.1 U4B.1 | length 12.2
  Top Copper w0.4: D6B.1 48.35,25 50.45,27.1 52.65,27.1 52.864,27.314 52.864,28.209 52.9,28.245 52.9,27.932 52.988,27.844 53.301,27.844 53.695,27.45 54.4,27.45 54.55,27.3 54.55,26.2 54.7,26.05 55.3,26.05 56.35,25 D5B.1
NetC7A_1: C7A.1 R5A.1 R6A.2 | length 3.1
  Top Copper w0.2: R6A.2@19.8,26.95 19.95,27.1 21.3,27.1 21.45,26.95 R5A.1@22.8,26.95
NetC7B_1: C7B.1 R5B.1 R6B.2 | length 3.1
  Top Copper w0.2: R6B.2@58.85,26.95 59,27.1 60.35,27.1 60.5,26.95 R5B.1@61.85,26.95
NetC9A_1: C9A.1 U4A.3 | length 10.2
  Top Copper w0.4: v2(11,28.3) 11.028,28.273 11.922,28.273 U4A.3@11.95,28.245 ; v2(14.2,21.4) C9A.1
  Bottom Copper w0.4: v2(11,28.3) 11,24.6 v2(14.2,21.4)
NetC9B_1: C9B.1 U4B.3 | length 10.2
  Top Copper w0.4: v2(50.05,28.3) 50.078,28.273 50.973,28.273 U4B.3@51,28.245 ; v2(53.25,21.4) C9B.1
  Bottom Copper w0.4: v2(50.05,28.3) 50.05,24.6 v2(53.25,21.4)
NetD1_1: D1.1 R1.1 | length 35.8
  Top Copper w0.3: D1.1 85.47,9.69 87.18,11.4 93.6,11.4 98.7,16.5 114.75,16.5 116.47,18.22 R1.1
NetD2_1: D2.1 R2.1 | length 26.8
  Top Copper w0.3: D2.1 93.47,9.69 95.18,11.4 101.6,11.4 105.92,15.72 R2.1
NetD3_1: D3.1 R3.1 | length 20.5
  Top Copper w0.3: D3.1 101.47,9.69 103.18,11.4 109.6,11.4 111.42,13.22 R3.1
NetD4_1: D4.1 R4.1 | length 11.5
  Top Copper w0.3: D4.1 109.47,9.69 110.5,10.72 R4.1
NetD5A_2: D5A.2 U3A.6 | length 2.9
  Top Copper w0.4: U3A.6 15.34,29.925 15.47,29.795 16.105,29.795 17.3,28.6 D5A.2
NetD5B_2: D5B.2 U3B.6 | length 2.9
  Top Copper w0.4: U3B.6 54.39,29.925 54.52,29.795 55.155,29.795 56.35,28.6 D5B.2
NetD6A_2: D6A.2 U3A.4 | length 2.1
  Top Copper w0.4: D6A.2 9.3,28.6 10.13,29.43 10.13,30.1 U3A.4
NetD6B_2: D6B.2 U3B.4 | length 2.1
  Top Copper w0.4: D6B.2 48.35,28.6 49.18,29.43 49.18,30.1 U3B.4
NetL1A_1: L1A.1 SW1A.3 U2A.6 | length 17.9
  Top Copper w0.2: U2A.6 21.865,28.865 22.93,27.8 23.9,27.8 24.775,26.925 L1A.1 ; SW1A.3 22.155,18.565 21.35,19.37 21.35,20.3 21.65,20.6 23.7,20.6 24.575,19.725 L1A.1 ; L1A.1@24.7,19.65 L1A.1
NetL1A_4: L1A.4 SW1A.4 U2A.7 | length 17.5
  Top Copper w0.2: SW1A.4 22.616,19.835 22.889,19.562 22.889,19.46 23.768,18.582 25.732,18.582 26.36,19.209 26.36,19.251 26.833,19.725 L1A.4 26.825,19.725 25.94,20.61 25.94,26.56 24.3,28.2 23.8,28.2 23.135,28.865 U2A.7
NetL1B_1: L1B.1 SW1B.3 U2B.6 | length 17.8
  Top Copper w0.2: U2B.6 60.915,28.865 61.98,27.8 62.95,27.8 63.825,26.925 L1B.1 63.625,19.725 62.75,20.6 60.7,20.6 60.4,20.3 60.4,19.37 61.205,18.565 SW1B.3
NetL1B_4: L1B.4 SW1B.4 U2B.7 | length 17.3
  Top Copper w0.2: SW1B.4 61.666,19.835 61.939,19.562 61.939,19.461 62.818,18.582 64.782,18.582 65.41,19.21 65.41,19.251 65.884,19.725 L1B.4 ; U2B.7 62.185,28.865 62.85,28.2 63.35,28.2 64.99,26.56 64.99,20.61 L1B.4@65.875,19.725
NetR5A_2: R5A.2 SW1A.1 | length 15
  Top Copper w0.2: SW1A.1 14.535,19.835 13.75,19.05 13.75,18.2 14.15,17.8 15.55,17.8 22.8,25.05 R5A.2
NetR5B_2: R5B.2 SW1B.1 | length 15
  Top Copper w0.2: SW1B.1 53.585,19.835 52.8,19.05 52.8,18.2 53.2,17.8 54.6,17.8 61.85,25.05 R5B.2
NetR6A_1: R6A.1 SW1A.2 | length 9.2
  Top Copper w0.2: SW1A.2 15.045,18.565 19.8,23.32 R6A.1@19.8,25.57
NetR6B_1: R6B.1 SW1B.2 | length 9.2
  Top Copper w0.2: SW1B.2 54.095,18.565 58.85,23.32 R6B.1
NetR7A_1: R7A.1 R8A.2 U4A.4 | length 3.8
  Top Copper w0.254: R8A.2 R7A.1@12.55,24 ; U4A.4@11.95,25.955 11.95,24.6 R7A.1@12.55,24 ; R7A.1@12.6,24 R7A.1@12.55,24
NetR7B_1: R7B.1 R8B.2 U4B.4 | length 3.8
  Top Copper w0.254: R8B.2 R7B.1@51.6,24 ; U4B.4@51,25.955 51,24.6 R7B.1@51.6,24 ; R7B.1@51.65,24 R7B.1@51.6,24
NetR9A_2: R9A.2 X4A.3 | length 2.4
  Top Copper w0.5: X4A.3 R9A.2
NetR9B_2: R9B.2 X4B.3 | length 2.4
  Top Copper w0.5: X4B.3 R9B.2
NetU1A_1: U1A.1 U3A.3
NetU1A_3: U1A.3 U3A.1
NetU1B_1: U1B.1 U3B.3
NetU1B_3: U1B.3 U3B.1
VIN: D1.2 D2.2 D3.2 D4.2 X1.10 | length 78.1
  Top Copper w0.5: D2.2 90.47,7 ; D3.2 98.47,7 ; D4.2 106.47,7.293 106.177,7 98.47,7 ; X1.10 116.395,20.145 113.75,17.5 83.5,17.5 81.5,15.5 81.5,10.11 82.517,9.093 82.517,7.383 82.9,7 90.47,7 ; 90.47,7 98.47,7
pads on no net: LG1.1 LG1.2 LG2.1 LG2.2 LG3.1 LG3.2 LG4.1 LG4.2 MH3.1 U1A.6 U1B.6 X4A.1 X4A.4 X4A.5 X4A.6 X4A.8 X4A.9 X4B.1 X4B.4 X4B.5 X4B.6 X4B.8 X4B.9

## Polygon pours and split planes (outlines as drawn)
GND on Top Copper "GND_L01_Plane" (solid, remove dead copper, pour order 44): -0.05,3 ccw(c3,3) 2.999,-0.05 3,-0.05 126.249,-0.05 126.25,-0.05 ccw(c126.25,3) 129.2,2.222 129.2,2 ccw(c129.25,2) 129.3,2 129.3,47 129.3,47.001 ccw(c126.25,47) 126.28,50.05 126.25,50.06 3,50.05 ccw(c3,47) -0.05,47.001 -0.05,47
GND_isoCANA on Top Copper "GND_ISOCANA_L01_Plane" (solid, remove dead copper, pour order 41): 33.096,-0.207 33.096,31.4 0.9,31.4 0.9,-0.207
GND_isoCANB on Top Copper "GND_ISOCANA_L01_Plane" (solid, remove dead copper, pour order 50): 72.146,-0.207 72.146,31.4 39.95,31.4 39.95,-0.207
5V_isoCANB on Top Copper "NONET_L-01_P-001" (solid, remove dead copper, pour order 49): 68.15,28.9 64.35,28.9 63.85,28.4 62.95,28.4 62.95,30.5 68.15,30.5
3V3 on Top Copper "NONET_L-01_P-001" (solid, remove dead copper, pour order 36): 52.25,38.7 52.25,42.3 53.15,42.3 53.55,41.9 55.65,41.9 55.65,43.5 54.95,43.5 53.75,43.5 53.15,42.9 52.25,42.9 52.25,44.5 51.45,44.5 51.45,38.7
1V8 on Top Copper "NONET_L-01_P-001" (solid, remove dead copper, pour order 30): 64.15,39.2 64.15,44.6 62.75,44.6 62.75,39.2
1V8 on Top Copper "NONET_L-01_P-001" (solid, remove dead copper, pour order 23): 25.1,39.2 25.1,44.6 23.7,44.6 23.7,39.2
5V_isoCANA on Top Copper "NONET_L-01_P-001" (solid, remove dead copper, pour order 21): 29.1,28.9 25.3,28.9 24.8,28.4 23.9,28.4 23.9,30.5 29.1,30.5
3V3 on Top Copper "NONET_L-01_P-001" (solid, remove dead copper, pour order 14): 13.2,38.7 13.2,42.3 14.1,42.3 14.5,41.9 16.6,41.9 16.6,43.5 15.9,43.5 14.7,43.5 14.1,42.9 13.2,42.9 13.2,44.5 12.4,44.5 12.4,38.7
5V_isoCANB on Top Copper "NONET_L-01_P-001" (solid, remove dead copper, pour order 48): 52.55,26.7 52.55,23.1 53.95,23.1 53.95,21.8 55.35,21.8 55.35,24 55.15,24.2 53.95,24.2 53.65,24.5 53.65,26.7
5V_isoCANA on Top Copper "NONET_L-01_P-001" (solid, remove dead copper, pour order 16): 13.5,26.7 13.5,23.1 14.9,23.1 14.9,21.8 16.3,21.8 16.3,24 16.1,24.2 14.9,24.2 14.6,24.5 14.6,26.7
NetU1B_1 on Top Copper "NONET_L-01_P-001" (solid, remove dead copper, pour order 35): 48.85,38.6 48.85,40.1 50.45,41.7 50.45,42.2 51.25,42.2 51.25,40.3 49.55,38.6
NetU1B_3 on Top Copper "NONET_L-01_P-001" (solid, remove dead copper, pour order 34): 54.85,38.6 54.85,40.1 53.25,41.7 53.25,42.2 52.45,42.2 52.45,40.3 54.15,38.6
NetU1B_3 on Top Copper "NONET_L-01_P-001" (solid, remove dead copper, pour order 32): 54.85,38.6 54.85,40.1 53.25,41.7 53.25,42.2 52.45,42.2 52.45,40.3 54.15,38.6
NetU1A_1 on Top Copper "NONET_L-01_P-001" (solid, remove dead copper, pour order 33): 9.8,38.6 9.8,40.1 11.4,41.7 11.4,42.2 12.2,42.2 12.2,40.3 10.5,38.6
NetU1A_3 on Top Copper "NONET_L-01_P-001" (solid, remove dead copper, pour order 31): 15.8,38.6 15.8,40.1 14.2,41.7 14.2,42.2 13.4,42.2 13.4,40.3 15.1,38.6
GND on Bottom Copper "GND_L04_Plane" (solid, remove dead copper, pour order 46): -0.05,3 ccw(c3,3) 2.999,-0.05 3,-0.05 126.249,-0.05 126.25,-0.05 ccw(c126.25,3) 129.2,2.222 129.2,2 ccw(c129.25,2) 129.3,2 129.3,47 129.3,47.001 ccw(c126.25,47) 126.28,50.05 126.25,50.06 3,50.05 ccw(c3,47) -0.05,47.001 -0.05,47
GND_isoCANA on Bottom Copper "GND_ISOCANA_L04_Plane" (solid, remove dead copper, pour order 18): 33.096,-0.207 33.096,31.4 0.9,31.4 0.9,-0.207
GND_isoCANB on Bottom Copper "GND_ISOCANA_L04_Plane" (solid, remove dead copper, pour order 19): 72.146,-0.207 72.146,31.4 39.95,31.4 39.95,-0.207
3V3 on Signal Layer 2 "3V3_L03_Plane" (solid, remove dead copper, pour order 51): -0.05,3 ccw(c3,3) 2.999,-0.05 3,-0.05 126.249,-0.05 126.25,-0.05 ccw(c126.25,3) 129.2,2.222 129.2,2 ccw(c129.25,2) 129.3,2 129.3,47 129.3,47.001 ccw(c126.25,47) 126.28,50.05 126.25,50.06 3,50.05 ccw(c3,47) -0.05,47.001 -0.05,47
5V_isoCANA on Signal Layer 2 "5V_ISOCANA_L03_Plane" (solid, remove dead copper, pour order 24): 33.096,-0.207 33.096,31.4 0.9,31.4 0.9,-0.207
5V_isoCANB on Signal Layer 2 "5V_ISOCANA_L03_Plane" (solid, remove dead copper, pour order 47): 72.146,-0.207 72.146,31.4 39.95,31.4 39.95,-0.207
GND on Signal Layer 1 "GND_L02_Plane" (solid, remove dead copper, pour order 43): -0.05,3 ccw(c3,3) 2.999,-0.05 3,-0.05 126.249,-0.05 126.25,-0.05 ccw(c126.25,3) 129.2,2.222 129.2,2 ccw(c129.25,2) 129.3,2 129.3,47 129.3,47.001 ccw(c126.25,47) 126.28,50.05 126.25,50.06 3,50.05 ccw(c3,47) -0.05,47.001 -0.05,47
GND_isoCANA on Signal Layer 1 "GND_ISOCANA_L02_Plane" (solid, remove dead copper, pour order 27): 33.096,-0.207 33.096,31.4 0.9,31.4 0.9,-0.207
GND_isoCANB on Signal Layer 1 "GND_ISOCANA_L02_Plane" (solid, remove dead copper, pour order 28): 72.146,-0.207 72.146,31.4 39.95,31.4 39.95,-0.207

## Keep-outs
Keep-Out Layer:
  region: 72.2,0 79.2,0 79.2,38.5 0,38.5 0,31.5 33.1,31.5 33.1,0 39.9,0 39.9,31.5 72.2,31.5

## Silkscreen, mask and mechanical layers (free items; w line width, h text height)
Top Overlay:
  lines w0.2: 0,38.45 79.15,38.45 79.15,0 ; 1,-0.1 1,31.3 33,31.3 33,0 ; 40.05,0 40.05,31.3 72.05,31.3 72.05,0
  text "isoGND" at 1.219,21.802 h1.5
  text "isoGND" at 40.269,21.802 h1.5
  text "off | on" at 17.353,21.158 h2
  text "off | on" at 56.403,21.159 h2
  text "iso5V" at 1.222,17.402 h1.5
  text "iso5V" at 40.272,17.402 h1.5
  text "CAN0" at 32.557,12.7 h3 r90
  text "CAN1" at 71.607,12.7 h3 r90
Mechanical 1:
  lines w0.1: 26.6,50 ccw(c26.6,53) 29.6,53 cw(c32.6,53) 32.6,56 33.6,56 cw(c33.6,53) 36.6,53 ccw(c39.6,53) 39.6,50 126.25,50.007 ; 26.6,50.002 3,50 ccw(c3,47) 0,47 0,3 ccw(c3,3) 3,0 126.25,0 ccw(c126.25,3) 129.25,3 129.25,47 ccw(c126.25,47) 126.25,50

## Dimensions
141.141,0 to 141.141,100 on Mechanical 2
146.143,97.802 to -14.84,72.216 on Mechanical 2
141.141,100 to -14.853,72.225 on Mechanical 2
141.141,100 to 0.031,100 on Mechanical 2

## Text inside footprints (layer, text, board x,y; h text height)
Serial1: Mechanical 5 "SerialNr" at 87.1,42.3 h0.7 r180